# Altium PCB SB0037A.PcbDoc (part 2 of 7)
Units mil, origin at the board's own origin, x right, y up, seen from the top; angles counter-clockwise.
Board outline 2872.5 x 4560 mil, 6 copper layers (Top Layer, L2, L3, L4, L5, Bottom Layer), stack 30.268 mil thick; 282 components, 292 nets, 1320 pads, 687 vias.
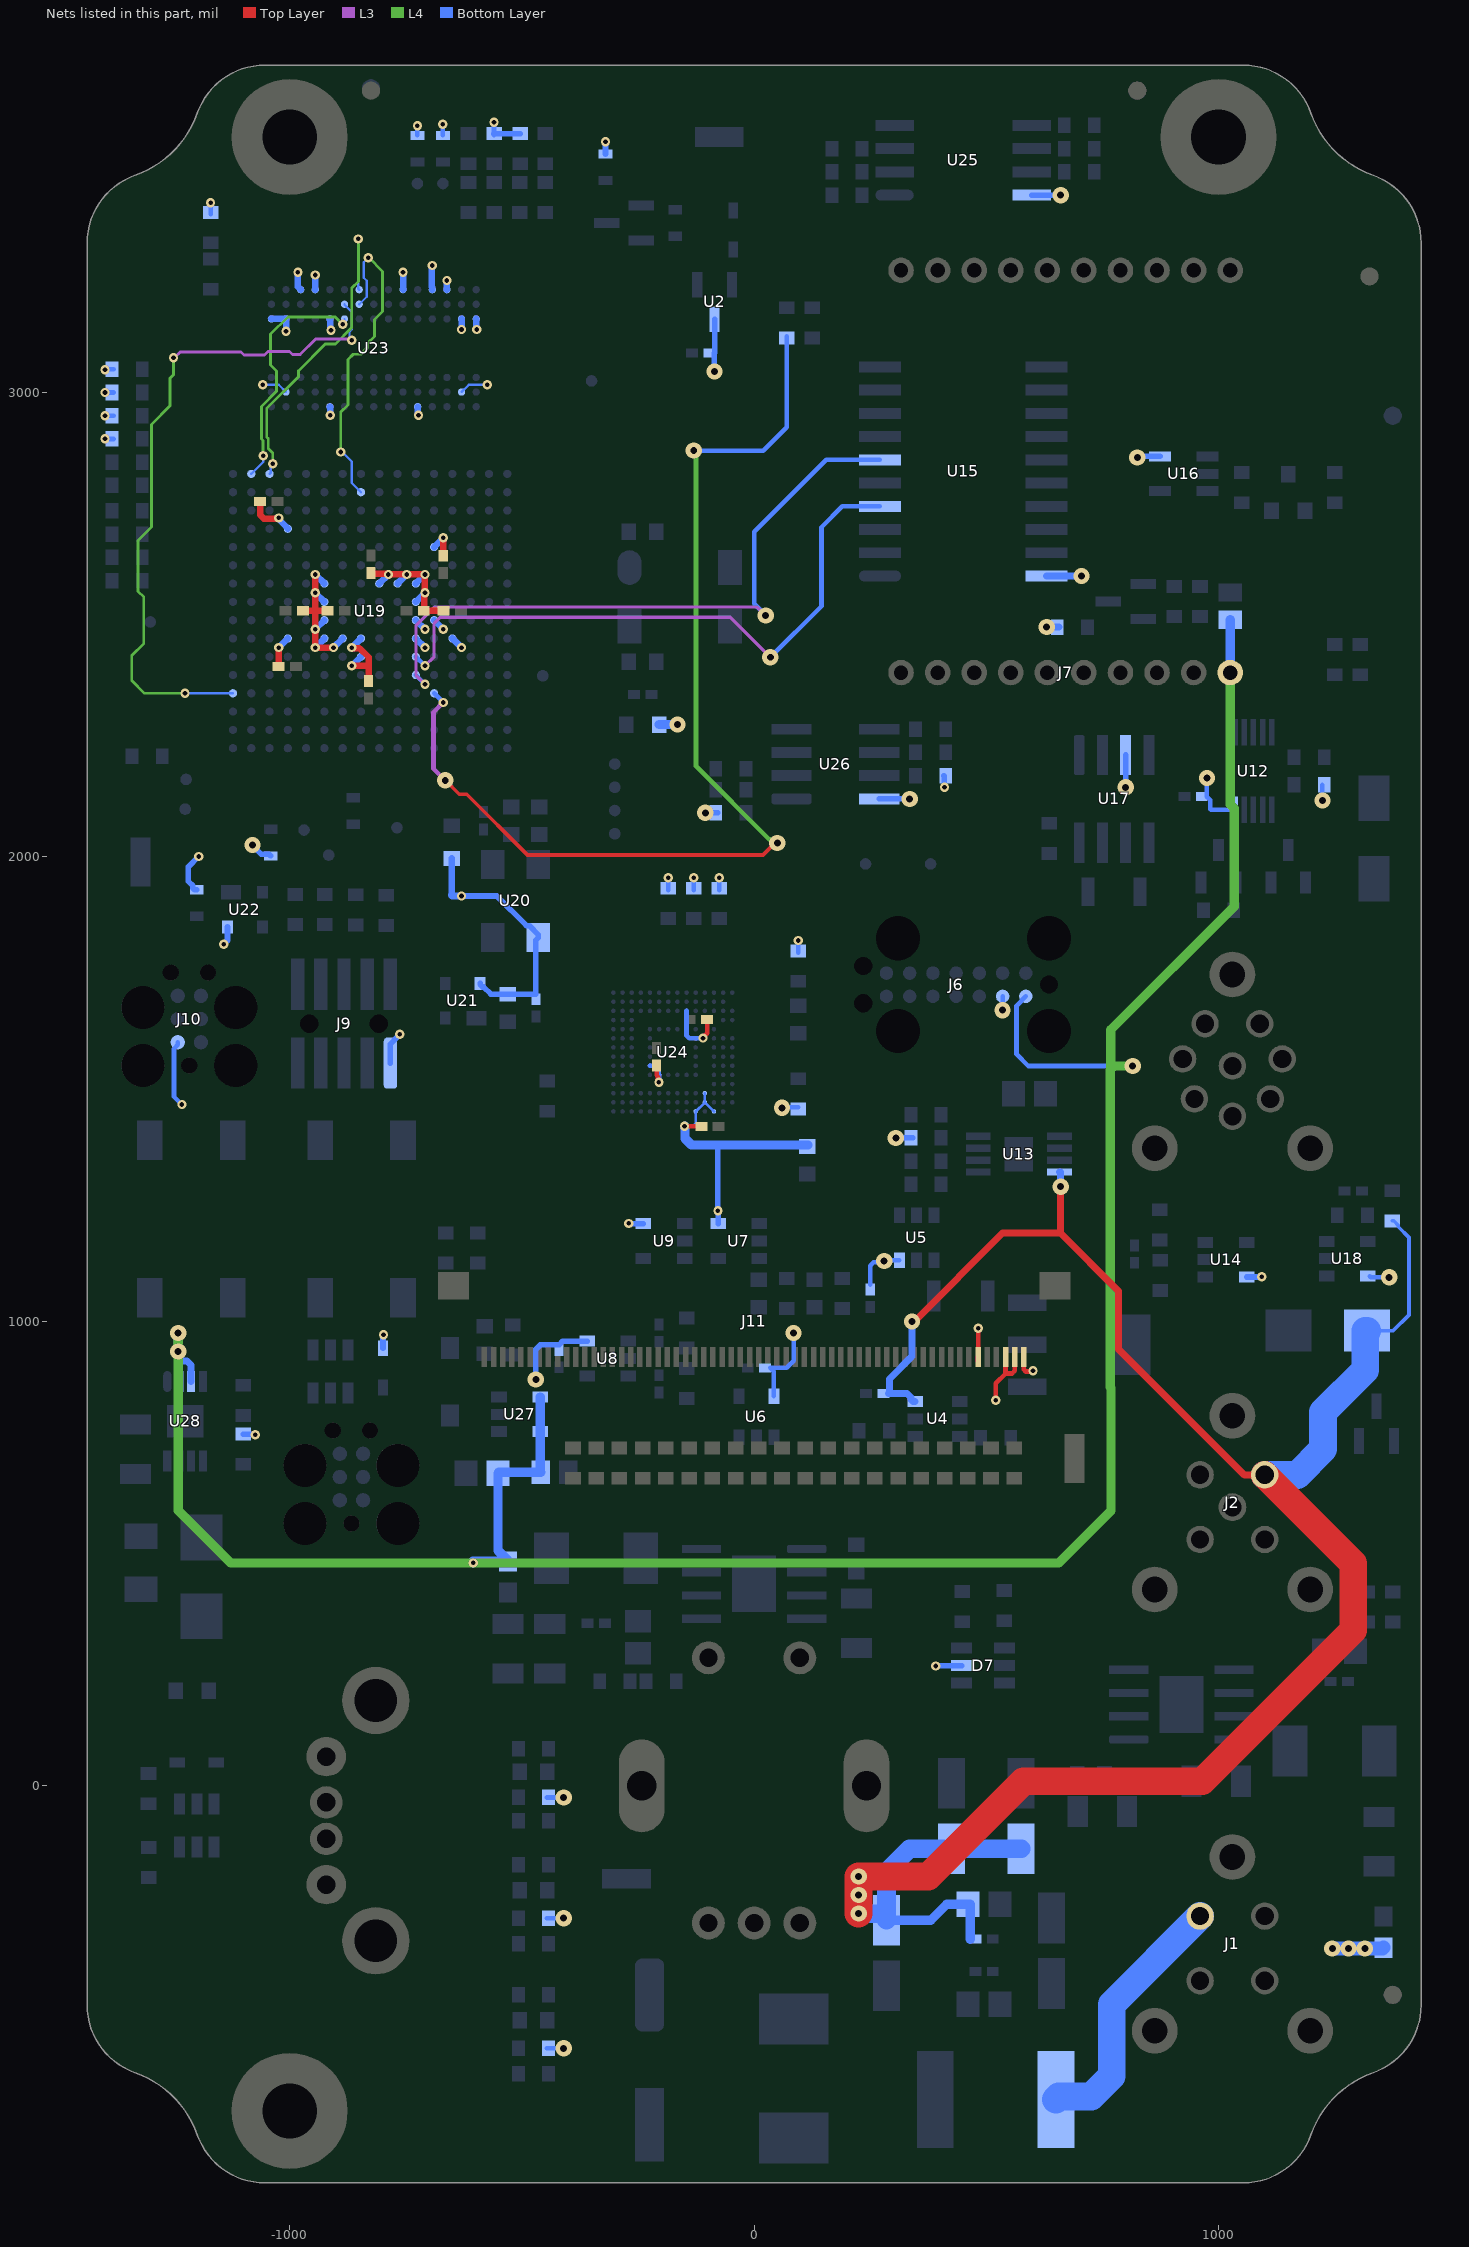
[diagram p6: the nets of this part, all layers, seen from the top]

## Part data
BTN1 BTN2: "SWITCH TACTILE SPST-NO 0.05A 12V", Contact Rating @ Voltage="0.05A @ 12VDC", Manufacturer="TE Connectivity", Operating Force=160gf, Supplier Part Number 1=450-1759-1-ND, Actuator Orientation="Top Actuated", Actuator Type=Standard, Category=Switches, Circuit=SPST-NO, ComponentLink1Description=http://documents.tycoelectronics.com/commerce/DocumentDelivery/DDEController?Action=srchrtrv&DocNm=2-1437565-7&DocType=CD&DocLang=EN, ComponentLink1URL=http://documents.tycoelectronics.com/commerce/DocumentDelivery/DDEController?Action=srchrtrv&DocNm=2-1437565-7&DocType=CD&DocLang=EN, Illumination=Non-Illuminated, Manufacturer Part Number=FSM4JSMATR, Mounting Type="Surface Mount", Outline="6.00mm x 6.00mm", Packaging="Cut Tape (CT)", Pricing 1="1=0.36, 10=0.34, 25=0.2912, 50=0.2474, 100=0.2377, 250=0.21344, 500=0.20374 (USD)", RoHS="RoHS Compliant", Stock 1=35617, Supplier 1=Digi-Key, Switch Function=Off-Mom, Termination Style="Gull Wing"
C1 C4 C6 C12 C13 C19 C20 C21 C24 C25 C26 C27 C29 C34 C38 C41 C42 C43 C44 C45 C46 C47 C48 C49 C50 C51 C53 C54 C55: library part CGA2B3X7R1E104K050BB, "CAP CER 0.1UF 25V X7R 0402", Manufacturer="TDK Corporation", Operating Temperature="-55°C ~ 125°C", Package=0402, Ratings=AEC-Q200, Supplier Part Number 1=445-6902-1-ND, Temperature Coefficient=X7R, Tolerance=±10%, Voltage - Rated=25V, Category=Capacitors, ComponentLink1Description="Datasheet (Internal)", ComponentLink1URL=datasheets\TDK\mlcc_automotive_general_en.pdf, ComponentLink2Description="Datasheet (External)", ComponentLink2URL=https://product.tdk.com/info/en/catalog/datasheets/mlcc_automotive_general_en.pdf, Features=-, Manufacturer Part Number=CGA2B3X7R1E104K050BB, Substitution Notes="0.1µF , 25V , ±10% , X7R , -55°C ~ 125°C , AEC-Q200 , 0402", Supplier 1=Digikey, Thickness (Max)=0.55MM
C2: library part EEE-FK1E221P, "CAP ALUM 220UF 25V 20% SMD", ESR (Equivalent Series Resistance)=-, Lifetime @ Temp#="2000 Hrs @ 105°C", Manufacturer="Panasonic Electronic Components", Operating Temperature="-55°C ~ 105°C", Package=F, Package / Case="Radial- Can - SMD", Ratings=AEC-Q200, Ripple Current=600mA, Sort Value=220000000, Sort Value Package=F_220000000, Supplier Part Number 1=PCE3800CT-ND, Temperature Coefficient="Temperature Coefficient", Tolerance=±20%, Value_Voltage="220µF  25V", Voltage Rating=25V, Capacitance=220µF, Category=Capacitors, ComponentLink1Description="Internal Datasheet", ComponentLink1URL=http://industrial.panasonic.com/www-cgi/jvcr13pz.cgi?E+PZ+3+ABA0120+EEEFK1E221P+7+WW, ComponentLink2Description="External Datasheet", ComponentLink2URL=http://industrial.panasonic.com/www-cgi/jvcr13pz.cgi?E+PZ+3+ABA0120+EEEFK1E221P+7+WW, Diameter=8.00, Features="General Purpose", Height=10.20, Height - Seated (Max)="0.402\" (10.20mm)", Impedance="160 mOhm", Lead Spacing=-, Manufacturer Part Number=EEE-FK1E221P, Mounting Type="Surface Mount", Packaging="Cut Tape (CT)", Size / Dimension="0.315\" Dia (8.00mm)", Supplier 1=Digi-Key, Surface Mount Land Size="0.327\" L x 0.327\" W (8.30mm x 8.30mm)"
C3 C5 C11 C18 C28: library part CGA4J3X7R1H105M125AE, "CAP CER 1UF 50V X7R 0805", Manufacturer="TDK Corporation", Operating Temperature="-55°C ~ 125°C", Package=0805, Ratings=AEC-Q200, Supplier Part Number 1=445-7958-1-ND, Temperature Coefficient=X7R, Tolerance=±20%, Voltage - Rated=50V, Category=Capacitors, ComponentLink1Description="Datasheet (Internal)", ComponentLink1URL=datasheets\TDK\mlcc_automotive_general_en.pdf, ComponentLink2Description="Datasheet (External)", ComponentLink2URL=https://product.tdk.com/info/en/catalog/datasheets/mlcc_automotive_general_en.pdf, Features="Soft Termination", Manufacturer Part Number=CGA4J3X7R1H105M125AE, Substitution Notes="1µF , 50V , ±20% , X7R , -55°C ~ 125°C , AEC-Q200 , 0805", Supplier 1=Digikey, Thickness (Max)=1.50MM
C7 C14: library part CGA5L1X7R1V106M160AE, "CAP CER 10UF 35V X7R 1206", Manufacturer="TDK Corporation", Package=1206, Ratings=AEC-Q200, Supplier Part Number 1=445-172484-1-ND, Temperature Coefficient=X7R, Tolerance=±20%, Voltage - Rated=35V, Category=Capacitors, ComponentLink1Description="Datasheet (Internal)", ComponentLink1URL=datasheets\TDK\mlcc_automotive_general_en.pdf, ComponentLink2Description="Datasheet (External)", ComponentLink2URL=https://product.tdk.com/info/en/catalog/datasheets/mlcc_automotive_general_en.pdf, Features="Soft Termination", Manufacturer Part Number=CGA5L1X7R1V106M160AE, Substitution Notes="10µF , 35V , ±20% , X7R ,  , AEC-Q200 , 1206", Supplier 1=Digikey, Thickness (Max)=1.90MM
C8 C15 C58: library part CGA3E3X7R1H224K080AB, "CAP CER 0.22UF 50V X7R 0603", Manufacturer="TDK Corporation", Operating Temperature="-55°C ~ 125°C", Package=0603, Ratings=AEC-Q200, Supplier Part Number 1=445-6926-1-ND, Temperature Coefficient=X7R, Tolerance=±10%, Voltage - Rated=50V, Category=Capacitors, ComponentLink1Description="Datasheet (Internal)", ComponentLink1URL=datasheets\TDK\mlcc_automotive_general_en.pdf, ComponentLink2Description="Datasheet (External)", ComponentLink2URL=https://product.tdk.com/info/en/catalog/datasheets/mlcc_automotive_general_en.pdf, Features=-, Manufacturer Part Number=CGA3E3X7R1H224K080AB, Substitution Notes="0.22µF , 50V , ±10% , X7R , -55°C ~ 125°C , AEC-Q200 , 0603", Supplier 1=Digikey, Thickness (Max)=0.90MM
C9 C10 C16 C17 C59: library part CGA5L1X7R0J226M160AC, "CAP CER 22UF 6.3V X7R 1206", Manufacturer="TDK Corporation", Operating Temperature="-55°C ~ 125°C", Package=1206, Ratings=AEC-Q200, Supplier Part Number 1=445-7884-1-ND, Temperature Coefficient=X7R, Tolerance=±20%, Voltage - Rated=6.3V, Category=Capacitors, ComponentLink1Description="Datasheet (Internal)", ComponentLink1URL=datasheets\TDK\mlcc_automotive_general_en.pdf, ComponentLink2Description="Datasheet (External)", ComponentLink2URL=https://product.tdk.com/info/en/catalog/datasheets/mlcc_automotive_general_en.pdf, Features=-, Manufacturer Part Number=CGA5L1X7R0J226M160AC, Substitution Notes="22µF , 6.3V , ±20% , X7R , -55°C ~ 125°C , AEC-Q200 , 1206", Supplier 1=Digikey, Thickness (Max)=1.60MM
C22 C23 C30 C31 C32 C39: library part CGA3E2C0G1H103J080AA, "CAP CER 10000PF 50V C0G 0603", Manufacturer="TDK Corporation", Operating Temperature="-55°C ~ 125°C", Package=0603, Ratings=AEC-Q200, Supplier Part Number 1=445-6916-1-ND, Temperature Coefficient="C0G, NP0", Tolerance=±5%, Voltage - Rated=50V, Category=Capacitors, ComponentLink1Description="Datasheet (Internal)", ComponentLink1URL=datasheets\TDK\mlcc_automotive_general_en.pdf, ComponentLink2Description="Datasheet (External)", ComponentLink2URL=https://product.tdk.com/info/en/catalog/datasheets/mlcc_automotive_general_en.pdf, Features=-, Manufacturer Part Number=CGA3E2C0G1H103J080AA, Substitution Notes="10000pF , 50V , ±5% , C0G, NP0 , -55°C ~ 125°C , AEC-Q200 , 0603", Supplier 1=Digikey, Thickness (Max)=0.90MM
C33 C57: library part CGA4J1X7R1V475K125AE, "CAP CER 4.7UF 35V X7R 0805", Manufacturer="TDK Corporation", Operating Temperature="-55°C ~ 125°C", Package=0805, Ratings=AEC-Q200, Supplier Part Number 1=445-172479-1-ND, Temperature Coefficient=X7R, Tolerance=±10%, Voltage - Rated=35V, Category=Capacitors, ComponentLink1Description="Datasheet (Internal)", ComponentLink1URL=datasheets\TDK\mlcc_automotive_general_en.pdf, ComponentLink2Description="Datasheet (External)", ComponentLink2URL=https://product.tdk.com/info/en/catalog/datasheets/mlcc_automotive_general_en.pdf, Features="Soft Termination", Manufacturer Part Number=CGA4J1X7R1V475K125AE, Substitution Notes="4.7µF , 35V , ±10% , X7R , -55°C ~ 125°C , AEC-Q200 , 0805", Supplier 1=Digikey, Thickness (Max)=1.50MM
C35 C36: library part CGA3E2C0G1H120J080AA, "CAP CER 12PF 50V C0G 0603", Manufacturer="TDK Corporation", Operating Temperature="-55°C ~ 125°C", Package=0603, Ratings=AEC-Q200, Supplier Part Number 1=445-5629-1-ND, Temperature Coefficient="C0G, NP0", Tolerance=±5%, Voltage - Rated=50V, Category=Capacitors, ComponentLink1Description="Datasheet (Internal)", ComponentLink1URL=datasheets\TDK\mlcc_automotive_general_en.pdf, ComponentLink2Description="Datasheet (External)", ComponentLink2URL=https://product.tdk.com/info/en/catalog/datasheets/mlcc_automotive_general_en.pdf, Features=-, Manufacturer Part Number=CGA3E2C0G1H120J080AA, Substitution Notes="12pF , 50V , ±5% , C0G, NP0 , -55°C ~ 125°C , AEC-Q200 , 0603", Supplier 1=Digikey, Thickness (Max)=0.90MM
C37 C40: library part CGA3E2C0G1H101J080AE, "CAP CER 100PF 50V NP0 0603", Manufacturer="TDK Corporation", Operating Temperature="-55°C ~ 125°C", Package=0603, Ratings=AEC-Q200, Supplier Part Number 1=445-173653-1-ND, Temperature Coefficient="C0G, NP0", Tolerance=±5%, Voltage - Rated=50V, Category=Capacitors, ComponentLink1Description="Datasheet (Internal)", ComponentLink1URL=datasheets\TDK\mlcc_automotive_general_en.pdf, ComponentLink2Description="Datasheet (External)", ComponentLink2URL=https://product.tdk.com/info/en/catalog/datasheets/mlcc_automotive_general_en.pdf, Features="Soft Termination", Manufacturer Part Number=CGA3E2C0G1H101J080AE, Substitution Notes="100pF , 50V , ±5% , C0G, NP0 , -55°C ~ 125°C , AEC-Q200 , 0603", Supplier 1=Digikey, Thickness (Max)=0.95MM
C52 C56: library part CGA3E1X7R0J225M080AC, "CAP CER 2.2UF 6.3V X7R 0603", Manufacturer="TDK Corporation", Operating Temperature="-55°C ~ 125°C", Package=0603, Ratings=AEC-Q200, Supplier Part Number 1=445-12572-1-ND, Temperature Coefficient=X7R, Tolerance=±20%, Voltage - Rated=6.3V, Category=Capacitors, ComponentLink1Description="Datasheet (Internal)", ComponentLink1URL=datasheets\TDK\mlcc_automotive_general_en.pdf, ComponentLink2Description="Datasheet (External)", ComponentLink2URL=https://product.tdk.com/info/en/catalog/datasheets/mlcc_automotive_general_en.pdf, Features=-, Manufacturer Part Number=CGA3E1X7R0J225M080AC, Substitution Notes="2.2µF , 6.3V , ±20% , X7R , -55°C ~ 125°C , AEC-Q200 , 0603", Supplier 1=Digikey, Thickness (Max)=0.90MM
D1: "DIODE TVS 15V 1500W UNI 5% SMC", Manufacturer="Littelfuse Inc", Package="DO-214AB- SMC", Power (Watts)=1500W, Supplier Device Package=SMC, Supplier Part Number 1=SMCJ15ALFCT-ND, Voltage - Breakdown=16.7V, Voltage - Reverse Standoff (Typ)=15V, Category="Circuit Protection", CategorySort=850, ComponentLink1Description="Internal Datasheet", ComponentLink1URL=http://www.littelfuse.com/data/en/Data_Sheets/Littelfuse_TVS_Diode_SMCJ.pdf, ComponentLink2Description="External Datasheet", ComponentLink2URL=http://www.littelfuse.com/data/en/Data_Sheets/Littelfuse_TVS_Diode_SMCJ.pdf, Diode Suffix=1A_2C, Manufacturer Part Number=SMCJ15A, Mounting Type="Surface Mount", Packaging="Cut Tape (CT)", Polarization=Unidirectional, SortValue=SMCJ15A, Supplier 1=Digi-Key
D2 D9 D11: "DIODE SCHOTTKY 40V 300MA SOD323", Average Rectified Current=300mA, Capacitance=10pF, Case/Package=SC, Forward Voltage=900mV, Manufacturer=STMicroelectronics, Max Forward Surge Current (Ifsm)=1A, Max Operating Temperature=150°C, Max Repetitive Reverse Voltage (Vrrm)=40V, Max Reverse Leakage Current=1uA, Min Operating Temperature=-40°C, Package Quantity=1, Peak Reverse Current=100uA, Supplier Part Number 1=497-7163-1-ND, Voltage Rating (DC)=30V, Category=Diodes, CategorySort=400, ComponentLink1Description=https://datasheet.ciiva.com/1177/1689724-1177952.pdf?src-supplier=Element14, ComponentLink1URL=https://datasheet.ciiva.com/1177/1689724-1177952.pdf?src-supplier=Element14, ComponentLink2Description=https://datasheet.ciiva.com/1200/1689724-1200625.pdf?src-supplier=Farnell, ComponentLink2URL=https://datasheet.ciiva.com/1200/1689724-1200625.pdf?src-supplier=Farnell, ComponentLink3Description=https://datasheet.ciiva.com/1200/cd00001322-1200626.pdf?src-supplier=Farnell, ComponentLink3URL=https://datasheet.ciiva.com/1200/cd00001322-1200626.pdf?src-supplier=Farnell, ComponentLink4Description=https://datasheet.ciiva.com/15192/getdatasheetpartid-185078-15192983.pdf?src-supplier=Verical, ComponentLink4URL=https://datasheet.ciiva.com/15192/getdatasheetpartid-185078-15192983.pdf?src-supplier=Verical, ComponentLink5Description=https://datasheet.ciiva.com/915/cd00001322-915529.pdf?src-supplier=Digi-Key, ComponentLink5URL=https://datasheet.ciiva.com/915/cd00001322-915529.pdf?src-supplier=Digi-Key, ComponentLink6Description=https://datasheet.ciiva.com/25954/cd00001322-25954459.pdf?src-supplier=Avnet+Europe, ComponentLink6URL=https://datasheet.ciiva.com/25954/cd00001322-25954459.pdf?src-supplier=Avnet+Europe, ComponentLink7Description=https://datasheet.ciiva.com/1177/1689724-1177950.pdf?src-supplier=Element14, ComponentLink7URL=https://datasheet.ciiva.com/1177/1689724-1177950.pdf?src-supplier=Element14, ComponentLink8Description=https://datasheet.ciiva.com/915/cd00001322-915527.pdf?src-supplier=Digi-Key, ComponentLink8URL=https://datasheet.ciiva.com/915/cd00001322-915527.pdf?src-supplier=Digi-Key, ComponentLink9Description=https://datasheet.ciiva.com/915/cd00001322-915528.pdf?src-supplier=Digi-Key, ComponentLink9URL=https://datasheet.ciiva.com/915/cd00001322-915528.pdf?src-supplier=Digi-Key, ComponentLink10Description=https://datasheet.ciiva.com/1177/1689724-1177951.pdf?src-supplier=Element14, ComponentLink10URL=https://datasheet.ciiva.com/1177/1689724-1177951.pdf?src-supplier=Element14, ComponentLink11Description=https://datasheet.ciiva.com/7622/1689724-7622351.pdf?src-supplier=Element14, ComponentLink11URL=https://datasheet.ciiva.com/7622/1689724-7622351.pdf?src-supplier=Element14, Contact Plating=Tin,Matte, Current Rating=300mA, Element Configuration=Single, Forward Current=300mA, Height=1.07mm, Lead Free="Lead Free", Length=1.8mm, Manufacturer Part Number=BAT54JFILM, Max Reverse Voltage (DC)=40V, Max Surge Current=1A, Mount="Surface Mount", Number of Pins=2, Output Current=300mA, Packaging 1="Tape and Reel", Peak Non-Repetitive Surge Current=1A, Polarity=Standard, Pricing 1="1=0.36000, 10=0.29200, 100=0.11960, 500=0.09978, 1000=0.06933 (USD)", Radiation Hardening=No, REACH SVHC="No SVHC", Recovery Time=5ns, Reverse Recovery Time=5ns, RoHS=Yes, Stock 1=46673, Supplier 1=Digi-Key, Termination=SMD/SMT, Weight=0.01lb, Width=1.45mm
D3: "DIODE SUPER FAST 2A 400V SMB", Capacitance @ Vr- F="25pF @ 4V- 1MHz", Current - Average Rectified (Io)=2A, Current - Reverse Leakage @ Vr="5µA @ 400V", Manufacturer="Diodes Inc", Package="DO-214AA- SMB", Supplier Device Package=SMB, Supplier Part Number 1=ES2G-FDICT-ND, Voltage - DC Reverse (Vr) (Max)=400V, Voltage - Forward (Vf) (Max) @ If="1.25V @ 2A", Category=Diodes, CategorySort=400, ComponentLink1Description="Internal Datasheet", ComponentLink1URL=http://www.diodes.com/datasheets/ds30212.pdf, ComponentLink2Description="External Datasheet", ComponentLink2URL=http://www.diodes.com/datasheets/ds30212.pdf, Diode Suffix=1A_2C, Diode Type=Standard, Manufacturer Part Number=ES2G-13-F, Mounting Type="Surface Mount", Num Pins=2, Packaging="Cut Tape (CT)", Reverse Recovery Time (trr)=35ns, SortValue=ES2G-13-F, Speed="Fast Recovery =< 500ns- > 200mA (Io)", Supplier 1=Digi-Key
D4: "DIODE SCHOTTKY 40V 2A SMA", Capacitance @ Vr- F="200pF @ 4V- 1MHz", Current - Average Rectified (Io)=2A, Current - Reverse Leakage @ Vr="500µA @ 40V", Manufacturer="Diodes Inc", Package="DO-214AC- SMA", Supplier Device Package=SMA, Supplier Part Number 1=B240A-FDICT-ND, Voltage - DC Reverse (Vr) (Max)=40V, Voltage - Forward (Vf) (Max) @ If="500mV @ 2A", Category=Diodes, CategorySort=400, ComponentLink1Description="Internal Datasheet", ComponentLink1URL=http://www.diodes.com/datasheets/ds13004.pdf, ComponentLink2Description="External Datasheet", ComponentLink2URL=http://www.diodes.com/datasheets/ds13004.pdf, Diode Suffix=1A_2C, Diode Type=Schottky, Manufacturer Part Number=B240A-13-F, Mounting Type="Surface Mount", Num Pins=2, Packaging="Cut Tape (CT)", Pricing="1 = 0.54  ;  10 = 0.38  ;  25 = 0.312  ;  100 = 0.2492  ;  250 = 0.18152  ;  500 = 0.1474  ;  1000 = 0.1133  ;  2500 = 0.10175 (USD)", Reverse Recovery Time (trr)=-, Sales Status=Active, SortValue=B240A-13-F, Speed="Fast Recovery =< 500ns- > 200mA (Io)", Stocked=-, Supplier 1=Digi-Key
D5: "DIODE ZENER 3.3V 300MW SOT23", Current - Reverse Leakage @ Vr="5µA @ 1V", Manufacturer="Diodes Inc", Operating Temperature="-65°C ~ 150°C", Package="TO-236-3- SC-59- SOT-23-3", Power - Max=300mW, Supplier Device Package=SOT-23-3, Supplier Part Number 1=BZX84B3V3-FDICT-ND, Tolerance=±2%, Voltage - Forward (Vf) (Max) @ If="900mV @ 10mA", Voltage - Zener (Nom) (Vz)=3.3V, Category=Diodes, CategorySort=400, ComponentLink1Description="Internal Datasheet", ComponentLink1URL=http://www.diodes.com/datasheets/BZX84Bxx(x).pdf, ComponentLink2Description="External Datasheet", ComponentLink2URL=http://www.diodes.com/datasheets/BZX84Bxx(x).pdf, Diode Suffix=1A_3C, Impedance (Max) (Zzt)="95 Ohm", Library Ref ARL=ARL_DZ_1A_3C, Manufacturer_P_N=BZX84B3V3-7-F, Manufacturer Part Number=BZX84B3V3-7-F, Mounting Type="Surface Mount", Num Pins=3, Packaging="Cut Tape (CT)", Pricing="1 = 0.19  ;  10 = 0.177  ;  25 = 0.1612  ;  100 = 0.1159  ;  250 = 0.06824  ;  500 = 0.05662  ;  1000 = 0.03863 (USD)", Sales Status=Active, SortValue=BZX84B3V3-7-F, Stocked=0, Supplier 1=Digi-Key
D6: "TVS DIODE 24VWM 70VC SOT23", Capacitance @ Frequency="11pF @ 1MHz", Current - Peak Pulse (10/1000µs)="3A (8/20µs)", Manufacturer="NXP Semiconductors", Operating Temperature="-65°C ~ 150°C", Package="TO-236-3, SC-59, SOT-23-3", Power - Peak Pulse=200W, Power Line Protection=No, Supplier Device Package=SOT-23-3, Supplier Part Number 1=568-4032-1-ND, Voltage - Breakdown (Min)=25.4V, Voltage - Clamping (Max) @ Ipp=70V, Voltage - Reverse Standoff (Typ)="24V (Max)", Applications=Automotive, Bidirectional Channels=2, Category=Diodes, CategorySort=400, ComponentLink1Description=http://www.nxp.com/documents/data_sheet/PESD1CAN.pdf, ComponentLink1URL=http://www.nxp.com/documents/data_sheet/PESD1CAN.pdf, Manufacturer 1="NXP Semiconductors", Manufacturer Part Number=PESD1CAN,215, Manufacturer Part Number 1=PESD1CAN,215, Mounting Type="Surface Mount", Packaging="Cut Tape (CT)", Pricing 1="1=0.55, 10=0.386, 25=0.3176, 100=0.2537, 250=0.1848, 500=0.15008, 1000=0.11536 (USD)", RoHS="RoHS Compliant", Stock 1=57937, Supplier 1=Digi-Key, Type=Zener, Unidirectional Channels=-
D7 D10 D13: "IC USB2.0 ESD PROTECTION SOT457", Manufacturer="NXP Semiconductors", Package="SC-74, SOT-457", Power (Watts)=100W, Supplier Device Package=6-TSOP, Supplier Part Number 1=568-5869-1-ND, Voltage - Breakdown=6V, Voltage - Reverse Standoff (Typ)=3V, Category=Diodes, CategorySort=400, ComponentLink1Description=http://www.nxp.com/documents/data_sheet/IP4234CZ6.pdf, ComponentLink1URL=http://www.nxp.com/documents/data_sheet/IP4234CZ6.pdf, Manufacturer 1="NXP Semiconductors", Manufacturer Part Number=IP4234CZ6,125, Manufacturer Part Number 1=IP4234CZ6,125, Mounting Type="Surface Mount", Packaging="Cut Tape (CT)", Polarization="2 Channel Array - Bidirectional", Pricing 1="1=0.52, 10=0.418, 25=0.3656, 100=0.3135, 250=0.27076, 500=0.23276, 1000=0.1805 (USD)", RoHS="RoHS Compliant", Stock 1=5142, Supplier 1=Digi-Key
D8: "DIODE SWITCH 100V 150MA SOD123", Capacitance @ Vr- F="2pF @ 0V- 1MHz", Current - Average Rectified (Io)=150mA, Current - Reverse Leakage @ Vr="1µA @ 75V", Manufacturer="Diodes Inc", Package=SOD-123, Supplier Part Number 1=1N4148W-FDICT-ND, Voltage - DC Reverse (Vr) (Max)=100V, Voltage - Forward (Vf) (Max) @ If="1.25V @ 150mA", Category=Diodes, CategorySort=400, ComponentLink1Description="Internal Datasheet", ComponentLink1URL=http://www.diodes.com/datasheets/ds30086.pdf, ComponentLink2Description="External Datasheet", ComponentLink2URL=http://www.diodes.com/datasheets/ds30086.pdf, Diode Suffix=1A_2C, Diode Type=Standard, Manufacturer Part Number=1N4148W-7-F, Mounting Type="Surface Mount", Num Pins=2, Packaging="Cut Tape (CT)", Reverse Recovery Time (trr)=4ns, SortValue=1N4148W-7-F, Speed="Small Signal =< 200mA (Io)- Any Speed", Supplier 1=Digi-Key, Supplier Device Package=SOD-123
D12: "TVS 5.0 VOLT 600 WATT UNI-DIR SM", Manufacturer="Littelfuse Inc", Package="DO-214AA- SMB", Power (Watts)=600W, Supplier Device Package=SMB, Supplier Part Number 1=SMBJ5.0ALFCT-ND, Voltage - Breakdown=6.4V, Voltage - Reverse Standoff (Typ)=5V, Category="Circuit Protection", CategorySort=850, ComponentLink1Description="Internal Datasheet", ComponentLink1URL=http://www.littelfuse.com/~/media/Files/Littelfuse/Technical%20Resources/Documents/Data%20Sheets/Littelfuse_TVS%20Diode_SMBJ.pdf, ComponentLink2Description="External Datasheet", ComponentLink2URL=http://www.littelfuse.com/~/media/Files/Littelfuse/Technical%20Resources/Documents/Data%20Sheets/Littelfuse_TVS%20Diode_SMBJ.pdf, Diode Suffix=1A_2C, Manufacturer Part Number=SMBJ5.0A, Mounting Type="Surface Mount", Packaging="Cut Tape (CT)", Polarization=Unidirectional, Pricing="1 = 0.46  ;  10 = 0.384  ;  25 = 0.336  ;  100 = 0.2877  ;  250 = 0.24952  ;  500 = 0.21134  ;  1000 = 0.16293 (USD)", Sales Status=Active, SortValue=SMBJ5.0A, Stocked=-, Supplier 1=Digi-Key
ENC1: "Encoders 15mm SHAFT w/SWITCH", Manufacturer=Bourns, Max Operating Temperature=70°C, Max Supply Voltage (DC)=5V, Min Operating Temperature=-30°C, Package Quantity=150, Supplier Part Number 1=PEC11R-4215K-S0024-ND, Built in Switch=Yes, Category=Encoders, ComponentLink1Description=https://datasheet.ciiva.com/29349/pec11r-29349515.pdf?src-supplier=Digi-Key, ComponentLink1URL=https://datasheet.ciiva.com/29349/pec11r-29349515.pdf?src-supplier=Digi-Key, ComponentLink2Description=https://datasheet.ciiva.com/30066/pec11r-221203-30066108.pdf?src-supplier=Onlinecomponents.com, ComponentLink2URL=https://datasheet.ciiva.com/30066/pec11r-221203-30066108.pdf?src-supplier=Onlinecomponents.com, ComponentLink3Description=https://datasheet.ciiva.com/12176/pec11r-221203-12176991.pdf?src-supplier=Mouser, ComponentLink3URL=https://datasheet.ciiva.com/12176/pec11r-221203-12176991.pdf?src-supplier=Mouser, Detent=Yes, Encoder Type=Mechanical, Height=13.4mm, Hole Diameter=1.8mm, Length=21.5mm, Manufacturer Part Number=PEC11R-4215K-S0024, Mount="Through Hole,Panel,PCB", Number of Channels=2, Orientation=Vertical, Output Type=Quadrature,Incremental, Packaging=Bulk, Pricing="1=1.68000, 10=1.56600, 25=1.47920, 50=1.30500, 100=1.07300, 250=1.04400, 500=0.98600, 1000=0.92800, 5000=0.81200 (USD)", Pulses per Revolution=24, REACH SVHC="No SVHC", RoHS=Yes, Stock=2990, Supplier 1=Digi-Key, Termination="PC Pin", Width=12.5mm
F1: library part 2920L300/15DR, "PTC RESETTABLE 15V 3A SMD 2920", Current - Hold (Ih) (Max)=3A, Current - Max=40A, Current - Trip (It)=5A, Current Trip=3, Manufacturer="Littelfuse Inc", Package="2920 (7351 Metric)- Concave", SortValue=15_3, Supplier Part Number 1=F2875CT-ND, Voltage - Max=15V, Category="Circuit Protection", CategorySort=850, ComponentLink1Description="Internal Datasheet", ComponentLink1URL=http://www.littelfuse.com/data/en/Data_Sheets/Littelfuse_PTC_2920L.pdf, ComponentLink2Description="External Datasheet", ComponentLink2URL=http://www.littelfuse.com/data/en/Data_Sheets/Littelfuse_PTC_2920L.pdf, Manufacturer Part Number=2920L300/15DR, Packaging="Cut Tape (CT)", R Min/Max="0.015 ~ 0.048 Ohm", Supplier 1=Digi-Key, Time to Trip=20s
F2: library part 1206L110THYR, "FUSE PTC RESET 8V 1.10A 1206", Current - Hold (Ih) (Max)=1.1A, Current - Max=100A, Current - Trip (It)=2.2A, Current Trip=1.1, Manufacturer="Littelfuse Inc", Package="1206 (3216 Metric)- Concave- Long Side Terminals", SortValue=8_1.1, Supplier Part Number 1=F3371CT-ND, Voltage - Max=8V, Category="Circuit Protection", CategorySort=850, ComponentLink1Description="Internal Datasheet", ComponentLink1URL=http://www.littelfuse.com/data/en/Data_Sheets/Littelfuse_PTC_1206L.pdf, ComponentLink2Description="External Datasheet", ComponentLink2URL=http://www.littelfuse.com/data/en/Data_Sheets/Littelfuse_PTC_1206L.pdf, Manufacturer Part Number=1206L110THYR, Packaging="Cut Tape (CT)", R Min/Max="0.040 ~ 0.180 Ohm", Supplier 1=Digi-Key, Time to Trip=0.1s
FID1 FID2 FID3 FID4 FID5 FID6 FID7 FID8: library part Fiducial
J1: "Circular Metric Connectors SACC-CI-M12MS- 4CON-L180 THR", Current Rating=4A, Manufacturer="Phoenix Contact", Max Operating Temperature=85°C, Min Operating Temperature=-25°C, Package Quantity=60, Ratings="IP67,Waterproof,Dust Tight", Supplier Part Number 1=277-13184-ND, Voltage Rating=250V, ComponentLink1Description=https://datasheet.ciiva.com/16136/1437164-16136065.pdf?src-supplier=Onlinecomponents.com, ComponentLink1URL=https://datasheet.ciiva.com/16136/1437164-16136065.pdf?src-supplier=Onlinecomponents.com, ComponentLink2Description=https://datasheet.ciiva.com/29256/586130-da-01-en-sens-akt-einbaust-4pol-1437164-60-st-29256645.pdf?src-supplier=Conrad, ComponentLink2URL=https://datasheet.ciiva.com/29256/586130-da-01-en-sens-akt-einbaust-4pol-1437164-60-st-29256645.pdf?src-supplier=Conrad, Connector Type=Plug, Contact Gender=Male, Contact Material=Brass, Contact Plating=Gold, Fastening Type=Threaded, Gender=Female, Housing Material=Polyamide, Manufacturer Part Number=1437164, Max Current Rating=4A, Mount="Through Hole", Number of Contacts=4, Number of Ports=1, Number of Positions=4, Number of Terminals=4, Orientation=Straight, Packaging=Tray, Pricing 1="1=6.15000, 10=5.88500, 50=5.72500, 100=5.35040, 250=4.92240, 500=4.54784, 1000=4.33387, 2500=3.87875 (USD)", RoHS=Yes, Stock 1=71, Strain Relief="No (Without)", Supplier 1=Digi-Key, Termination=Solder, Thread Size=M12
J2: "Flush-type connector SACC-CI-M12FS-5CON-L180-THR 1551448 Phoenix Contact", Current Rating=4A, Manufacturer="Phoenix Contact", Max Operating Temperature=85°C, Min Operating Temperature=-25°C, Package Quantity=60, Ratings="IP67,Waterproof,Dust Tight", Supplier Part Number 1=277-13414-ND, Voltage Rating=60V, ComponentLink1Description=https://datasheet.ciiva.com/618/1551448-618993.pdf?src-supplier=Digi-Key, ComponentLink1URL=https://datasheet.ciiva.com/618/1551448-618993.pdf?src-supplier=Digi-Key, ComponentLink2Description=https://datasheet.ciiva.com/24433/1551448-24433704.pdf?src-supplier=Onlinecomponents.com, ComponentLink2URL=https://datasheet.ciiva.com/24433/1551448-24433704.pdf?src-supplier=Onlinecomponents.com, ComponentLink3Description=https://datasheet.ciiva.com/29259/719975-da-01-en-sens-akt-einbaubuch-5pol-1551448-60-st-29259372.pdf?src-supplier=Conrad, ComponentLink3URL=https://datasheet.ciiva.com/29259/719975-da-01-en-sens-akt-einbaubuch-5pol-1551448-60-st-29259372.pdf?src-supplier=Conrad, Connector Type=Receptacle, Contact Gender=Female, Contact Material=Brass, Contact Plating=Gold, Fastening Type=Threaded, Lead Free="Lead Free", Manufacturer Part Number=1551448, Max Current Rating=4A, Mount="Through Hole", Number of Contacts=5, Number of Ports=1, Number of Positions=5, Number of Terminals=5, Orientation=Straight, Packaging=Tray, Plating=Polyamide, Pricing="1=8.12, 10=7.771, 50=7.5588, 100=7.0642, 250=6.4991, 500=6.0046, 1000=5.722, 2500=5.3688 (USD)", RoHS=Yes, Stock=70, Supplier 1=Digi-Key, Termination=Solder, Thread Size=M12, Weight=0.123459oz
J3 J4: "0603 Solid High Current Jumper", Manufacturer="Keystone Electronics", Operating Temperature=-, Package / Case="0603 (1608 Metric)", Power (Watts)="0.5W, 1/2W", Resistance (Ohms)=0.0, Supplier Device Package=0603, Supplier Part Number 1=36-5110CT-ND, Tolerance=Jumper, Category=5110, ComponentLink1Description=http://www.keyelco.com/product-pdf.cfm?p=14038, ComponentLink1URL=http://www.keyelco.com/product-pdf.cfm?p=14038, Composition="Thick Film", Features=-, Height="0.028\" (0.70mm)", Manufacturer Part Number=5110, Number of Terminations=2, Packaging="Cut Tape (CT)", Pricing 1="1=0.41, 10=0.384, 50=0.28, 100=0.2691, 250=0.24164, 500=0.23066 (USD)", RoHS="RoHS Compliant", Size / Dimension="0.061\" L x 0.033\" W (1.55mm x 0.85mm)", Stock 1=23484, Supplier 1=Digi-Key, Temperature Coefficient=-
J5: "Circular Metric Connectors SACC-DSI-FSD -4CON-PG9/0,5 SCO", Current Rating=2A, Manufacturer="Phoenix Contact", Max Operating Temperature=85°C, Min Operating Temperature=-25°C, Package Quantity=1, Ratings="IP67,Waterproof,Dust Tight", Supplier Part Number 1=277-8390-ND, Voltage Rating=30V, Category="Circular Connectors", ComponentLink1Description=https://datasheet.ciiva.com/15179/getdatasheetpartid-320397-15179574.pdf?src-supplier=Verical, ComponentLink1URL=https://datasheet.ciiva.com/15179/getdatasheetpartid-320397-15179574.pdf?src-supplier=Verical, Connector Type=Plug, Contact Gender=Female, Contact Material=Brass, Contact Plating=Gold, Fastening Type=Threaded, Lead Free="Lead Free", Manufacturer Part Number=1552269, Max Current Rating=2A, Mount="Through Hole", Number of Contacts=8, Number of Positions=8, Orientation=Straight, Packaging=Tray, Pricing="1=11.18000, 10=10.69000, 50=10.39880, 100=9.71850, 250=8.94108, 500=8.26078, 1000=7.87201 (USD)", Radiation Hardening=No, RoHS=Yes, Stock=60, Strain Relief="No (Without)", Supplier 1=Digi-Key, Termination=Solder, Thread Size=M12, Weight=0.128397oz
J6: library part TC2070
J7 J8: "CONN RECEPT 2MM SINGLE STR 10POS", Colour=Black, Current Rating=1A, Insulation Resistance=5GR, Manufacturer=Sullins, Max Operating Temperature=105°C, Min Operating Temperature=-40°C, Package Quantity=1000, Supplier Part Number 1=S5751-10-ND, ComponentLink1Description=https://drawings-pdf.s3.amazonaws.com/10483.pdf, ComponentLink1URL=https://drawings-pdf.s3.amazonaws.com/10483.pdf, Connector Type=Header,Socket, Contact Material=Bronze, Contact Plating=Gold, Gender=Female, Lead Free="Lead Free", Manufacturer Part Number=NPPN101BFCN-RC, Material=Nylon, Mount="Through Hole", Number of Positions=10, Number of Rows=1, Packaging=Bulk, Pitch=0.079inch, Pricing="1 = 0.98000, 60 = 0.78033, 120 = 0.74650, 540 = 0.61074, 1020 = 0.54288, 5040 = 0.49010 (USD)", RoHS=Yes, Stock=72438, Supplier 1=Digi-Key, Termination=Solder
J9: "CONN HEADER 10POS DUAL .05\" SMD", Color=Black, Manufacturer="Samtec Inc", Supplier Part Number 1=FTSH-105-01-F-DV-K-A-ND, Category=Connectors, CategorySort=800, ComponentLink1Description=http://www.samtec.com/documents/webfiles/cpdf/FTSH-1XX-XX-XXX-DV-XXX-MKT.pdf, ComponentLink1URL=http://www.samtec.com/documents/webfiles/cpdf/FTSH-1XX-XX-XXX-DV-XXX-MKT.pdf, Connector Type="Header, Unshrouded", Contact Finish=Gold, Contact Finish Thickness="3µin (0.08µm)", Contact Mating Length="0.120\" (3.05mm)", Contact Type="Male Pin", Fastening Type=-, Features=-, Manufacturer Part Number=FTSH-105-01-F-DV-K-A, Mounting Type="Surface Mount", Number of Positions=10, Number of Positions Loaded=All, Number of Rows=2, Packaging=Tube, Pitch="0.050\" (1.27mm)", Pricing 1="1=3.59 (USD)", RoHS="RoHS Compliant", Row Spacing="0.050\" (1.27mm)", Stock 1=0, Supplier 1=Digi-Key, Termination=Solder
J10: "Tag Connect Pads - No latching Clips - ARM"
J11: "CONN FPC 60POS 0.50MM R/A", Contact Resistance=50mR, Current Rating=500mA, Flammability Rating="UL94 V-0", Housing Color=Natural, Manufacturer=Omron, Max Operating Temperature=85°C, Max Voltage Rating (AC)=50V, Min Operating Temperature=-30°C, Package Quantity=1, Supplier Part Number 1=88M4894, Actuator Material="Polymer,Liquid Crystal Polymer", ComponentLink1Description=https://datasheet.ciiva.com/26945/getdatasheetpartid-792262-26945584.pdf?src-supplier=Verical, ComponentLink1URL=https://datasheet.ciiva.com/26945/getdatasheetpartid-792262-26945584.pdf?src-supplier=Verical, ComponentLink2Description=https://datasheet.ciiva.com/672/en-xf2m-672256.pdf?src-supplier=Digi-Key, ComponentLink2URL=https://datasheet.ciiva.com/672/en-xf2m-672256.pdf?src-supplier=Digi-Key, ComponentLink3Description=https://datasheet.ciiva.com/10367/xf2m-10367321.pdf?src-supplier=Avnet, ComponentLink3URL=https://datasheet.ciiva.com/10367/xf2m-10367321.pdf?src-supplier=Avnet, ComponentLink4Description=https://datasheet.ciiva.com/16122/en-xf2m-16122554.pdf?src-supplier=Onlinecomponents.com, ComponentLink4URL=https://datasheet.ciiva.com/16122/en-xf2m-16122554.pdf?src-supplier=Onlinecomponents.com, ComponentLink5Description=https://datasheet.ciiva.com/672/en-xf2m-672255.pdf?src-supplier=Digi-Key, ComponentLink5URL=https://datasheet.ciiva.com/672/en-xf2m-672255.pdf?src-supplier=Digi-Key, ComponentLink6Description=https://datasheet.ciiva.com/7989/1465437-7989453.pdf?src-supplier=Element14, ComponentLink6URL=https://datasheet.ciiva.com/7989/1465437-7989453.pdf?src-supplier=Element14, ComponentLink7Description=https://datasheet.ciiva.com/672/en-xf2m-672254.pdf?src-supplier=Digi-Key, ComponentLink7URL=https://datasheet.ciiva.com/672/en-xf2m-672254.pdf?src-supplier=Digi-Key, Contact Material="Copper Alloy", Contact Plating=Gold, Depth=6.2mm, Gender=Receptacle, Housing Material=Polymer, Lead Free="Lead Free", Length=34.1mm, Manufacturer Part Number=XF2M-6015-1AH, Max Current Rating=500mA, Max Voltage Rating (DC)=50V, Mount="Surface Mount", Number of Contacts=60, Number of Positions=60, Number of Rows=1, Orientation="Right Angle", Packaging="Tape and Reel", Pitch=0.5mm, Pricing 1="1=0.63900, 10=0.63900, 25=0.63900, 50=0.63900, 100=0.63900, 250=0.63900, 500=0.63900 (USD)", REACH SVHC=Unknown, RoHS=Yes, Stock 1=1054, Supplier 1=Newark, Termination=Solder, Voltage Rating=50V
J12: "Tag Connect Pads - No latching Clips - USB"
J13: "CONN RCPT USB2.0 TYPEA 4POS PCB", Flammability Rating="UL94 V-0", Manufacturer="Amphenol Industrial", Ratings=IP67, Supplier Part Number 1=MUSBRA511R0-ND, Category=Connectors, CategorySort=800, ComponentLink1Description=https://cdn.amphenol-icc.com/media/wysiwyg/files/documentation/datasheet/inputoutput/io_harsh_musb-type-a-b-ab.pdf?src-supplier=Digi-Key, ComponentLink1URL=https://cdn.amphenol-icc.com/media/wysiwyg/files/documentation/datasheet/inputoutput/io_harsh_musb-type-a-b-ab.pdf?src-supplier=Digi-Key, Connector Type=USB, Features=Shielded, Gender=Receptacle, Manufacturer Part Number=MUSBRA511R0, Mount="Through Hole,Panel", Number of Contacts=4, Orientation=Straight, Packaging 1=Bulk, Pricing 1="1=9.44000, 10=9.02900, 25=8.20800, 50=7.79760, 100=7.59240, 250=6.77160, 500=6.36120, 1000=5.92800 (USD)", RoHS=Yes, Stock 1=619, Supplier 1=Digi-Key
L1 L2 L4 L5: library part 35F0121-0SR-10, "Power Supply FB 10A", Case/Package=SMD/SMT, Case Code (Imperial)=1612, Case Code (Metric)=4131, DC Resistance (DCR)=0.75mR, Frequency=10MHz, Manufacturer="Laird Steward", Manufacturer Name=Laird, Max Current Rating=10A, Max Operating Temperature=125°C, Min Operating Temperature=-40°C, Package Quantity=2500, Resistance=42R, Supplier Part Number 1=240-2520-1-ND, Test Frequency=100MHz, Tolerance=25%, ComponentLink1Description=http://lairdtech.thomasnet.com/Asset/35F0121-0SR-10-C-2-VP.pdf, ComponentLink1URL=http://lairdtech.thomasnet.com/Asset/35F0121-0SR-10-C-2-VP.pdf, ComponentLink2Description=http://datasheet.octopart.com/35F0121-0SR-10-Steward-datasheet-65778.pdf, ComponentLink2URL=http://datasheet.octopart.com/35F0121-0SR-10-Steward-datasheet-65778.pdf, ComponentLink3Description=http://datasheet.octopart.com/35F0121-0SR-10-Steward-datasheet-153820.pdf, ComponentLink3URL=http://datasheet.octopart.com/35F0121-0SR-10-Steward-datasheet-153820.pdf, ComponentLink4Description=http://datasheet.octopart.com/35F0121-0SR-10-Steward-datasheet-14434158.pdf, ComponentLink4URL=http://datasheet.octopart.com/35F0121-0SR-10-Steward-datasheet-14434158.pdf, Core Material=Ferrite, Depth=3.05mm, Height=0.12inch, Impedance=41R, Lead Free="Lead Free", Length=0.16inch, Manufacturer Part No.=35F0121-0SR-10, Manufacturer Part Number=35F0121-0SR-10, Max DC Current=10A, Mount="Surface Mount", Number of Lines=1, Packaging="Tape and Reel", Pricing="1 = 0.29000, 10 = 0.22600, 25 = 0.18760, 50 = 0.16160, 100 = 0.14540, 250 = 0.12280, 500 = 0.10988, 1000 = 0.09371 (USD)", Rating=10A, Stock=289479, Supplier 1=Digi-Key, Termination=SMD/SMT, Weight=0.00512oz, Width=0.12inch
L3 L6: library part IHLP2020CZER2R2M11, "FIXED IND 2.2UH 6.75A 25 MOHM", Case/Package=2020, Current Rating=6.75A, DC Resistance (DCR)=25mR, Inductance Tolerance=20%, Manufacturer="Vishay Dale", Max DC Current=5.5A, Max Operating Temperature=125°C, Min Operating Temperature=-55°C, Package Quantity=2000, Self Resonant Frequency=41MHz, Supplier Part Number 1=541-1236-1-ND, Test Frequency=100kHz, Category=INDUCTOR, CategorySort=300, ComponentLink1Description=https://datasheet.ciiva.com/11798/0900766b8102c930-11798352.pdf?src-supplier=RSComponents, ComponentLink1URL=https://datasheet.ciiva.com/11798/0900766b8102c930-11798352.pdf?src-supplier=RSComponents, ComponentLink2Description=https://datasheet.ciiva.com/1051/lp20cz11-1051642.pdf?src-supplier=Digi-Key, ComponentLink2URL=https://datasheet.ciiva.com/1051/lp20cz11-1051642.pdf?src-supplier=Digi-Key, ComponentLink3Description=https://datasheet.ciiva.com/1051/lp20cz11-1051643.pdf?src-supplier=Digi-Key, ComponentLink3URL=https://datasheet.ciiva.com/1051/lp20cz11-1051643.pdf?src-supplier=Digi-Key, ComponentLink4Description=https://datasheet.ciiva.com/17269/lp20cz11-17269547.pdf?src-supplier=Avnet+Europe, ComponentLink4URL=https://datasheet.ciiva.com/17269/lp20cz11-17269547.pdf?src-supplier=Avnet+Europe, ComponentLink5Description=https://datasheet.ciiva.com/1051/lp20cz11-1051644.pdf?src-supplier=Digi-Key, ComponentLink5URL=https://datasheet.ciiva.com/1051/lp20cz11-1051644.pdf?src-supplier=Digi-Key, ComponentLink6Description=https://datasheet.ciiva.com/24205/lp20cz11-24205966.pdf?src-supplier=Future+Electronics, ComponentLink6URL=https://datasheet.ciiva.com/24205/lp20cz11-24205966.pdf?src-supplier=Future+Electronics, ComponentLink7Description=https://datasheet.ciiva.com/46385/480942-46385615.pdf?src-supplier=Element14, ComponentLink7URL=https://datasheet.ciiva.com/46385/480942-46385615.pdf?src-supplier=Element14, Contact Plating=Tin, Core Material=Metal,Composite, Depth=5.43mm, Height=3mm, Height - Seated (Max)=0.118inch, Inductance=2.2uH, Lead Free="Lead Free", Length=5.74mm, Manufacturer Part Number=IHLP2020CZER2R2M11, Military Standard=Not, Mount="Surface Mount", Packaging 1="Tape and Reel", Pricing 1="1=2.39000, 10=2.20800, 100=1.54560, 500=1.25120, 1000=1.14080 (USD)", Radiation Hardening=No, REACH SVHC=Unknown, RMS Current (Irms)=6.75A, RoHS=Yes, Saturation Current=5.5A, Shielding=Shielded, Stock 1=63099, Supplier 1=Digi-Key, Termination=SMD/SMT, Tolerance=20%, Width=0.204inch
L7 L8 L10: "FERRITE CHIP 600 OHM 500MA 0603", Current Rating=500mA, DC Resistance (DCR)="380 mOhm Max", Impedance @ Frequency="600 Ohm @ 100MHz", Manufacturer="Murata Electronics North America", Package="0603 (1608 Metric)", Supplier Part Number 1=490-1014-1-ND, Category=Inductors, CategorySort=300, ComponentLink1Description=http://search.murata.co.jp/Ceramy/image/img/PDF/ENG/L0110S0100BLM18A.pdf, ComponentLink1URL=http://search.murata.co.jp/Ceramy/image/img/PDF/ENG/L0110S0100BLM18A.pdf, Filter Type="Differential Mode - Single", Height (Max)="0.037\" (0.95mm)", Manufacturer Part Number=BLM18AG601SN1D, Mounting Type="Surface Mount", Packaging="Cut Tape (CT)", Pricing 1="1=0.1, 10=0.079, 50=0.0648, 100=0.0476, 250=0.0346, 500=0.0317, 1000=0.02738 (USD)", RoHS="RoHS Compliant", Size / Dimension="0.063\" L x 0.031\" W (1.60mm x 0.80mm)", Stock 1=139441, Supplier 1=Digi-Key
L9: library part LBR2012T470KV, "Inductor 47µH 0.075A", Inductance (uH)=47, Manufacturer="Taiyo Yuden", Package=0805, Rating=AEC-Q200, Sort Value=47_0.075, Sort Value Package=47_0.075_0805, Supplier Part Number 1=587-4044-1-ND, Tolerance=±10%, Category=Inductors, CategorySort=300, ComponentLink1Description="External Datasheet", ComponentLink1URL="https://ds.yuden.co.jp/TYCOMPAS/ut/detail?pn=LBR2012T470KV  &u=M", DCR Max (Ohms)=1.7Ohm, Height (mm)=1.45MM, IRMS=0.075, Isat (A)=0.075, Manufacturer Part Number=LBR2012T470KV, Part Number=LBR2012T470KV, Shielding=Unshielded, SRF typ (MHz)=11MHz, Supplier 1=Digikey, Supplier Unit Price 1=0.25
Q1: "Trans MOSFET N-CH 40V 7A 4-Pin(3+Tab) SOT-223 T/R", Case/Package=SOT-223, Continuous Drain Current (ID)=7A, Current Rating=6.7A, Drain to Source Breakdown Voltage=40V, Drain to Source Resistance=75mR, Gate to Source Voltage (Vgs)=20V, Input Capacitance=770pF, Manufacturer="Diodes Zetex", Max Operating Temperature=150°C, Max Power Dissipation=3.9W, Min Operating Temperature=-55°C, Package Quantity=1000, Supplier Part Number 1=ZXMN4A06GCT-ND, Threshold Voltage=1V, ComponentLink1Description=https://datasheet.ciiva.com/16509/zxmn4a06g-16509072.pdf?src-supplier=Future+Electronics, ComponentLink1URL=https://datasheet.ciiva.com/16509/zxmn4a06g-16509072.pdf?src-supplier=Future+Electronics, ComponentLink2Description=https://datasheet.ciiva.com/11176/zxmn4a06g-11176340.pdf?src-supplier=Avnet, ComponentLink2URL=https://datasheet.ciiva.com/11176/zxmn4a06g-11176340.pdf?src-supplier=Avnet, ComponentLink3Description=https://datasheet.ciiva.com/26816/getdatasheetpartid-86229-26816612.pdf?src-supplier=Verical, ComponentLink3URL=https://datasheet.ciiva.com/26816/getdatasheetpartid-86229-26816612.pdf?src-supplier=Verical, ComponentLink4Description=https://datasheet.ciiva.com/5775/44098-5775224.pdf?src-supplier=Farnell, ComponentLink4URL=https://datasheet.ciiva.com/5775/44098-5775224.pdf?src-supplier=Farnell, ComponentLink5Description=https://datasheet.ciiva.com/11174/zxmn4a06g-11174983.pdf?src-supplier=Avnet, ComponentLink5URL=https://datasheet.ciiva.com/11174/zxmn4a06g-11174983.pdf?src-supplier=Avnet, Drain to Source Voltage (Vdss)=40V, Element Configuration=Single, Fall Time=7.35ns, Height=1.65mm, Lead Free="Lead Free", Length=6.7mm, Manufacturer Part Number=ZXMN4A06GTA, Mount="Surface Mount", Number of Channels=1, Number of Elements=1, Number of Pins=4, On-State Resistance=75mR, Packaging="Tape and Reel", Power Dissipation=3.9W, Pricing 1="1=0.84000, 10=0.73900, 100=0.50380, 500=0.42096 (USD)", Radiation Hardening=No, Rds On Max=50mR, REACH SVHC="No SVHC", Rise Time=4.45ns, RoHS=Yes, Stock 1=50125, Supplier 1=Digi-Key, Turn-Off Delay Time=28.61ns, Turn-On Delay Time=2.55ns, Voltage Rating (DC)=40V, Weight=0.000282oz, Width=3.7mm
Q2 Q3: "FAIRCHILD SEMICONDUCTOR - BSS138 - N CHANNEL MOSFET, 50V, 220mA SOT-23", Manufacturer="FAIRCHILD SEMICONDUCTOR", Package=SOT-23, Supplier Part Number 1=58K8769, Category=Semiconductors, CategorySort=500, ComponentLink1Description=http://www.fairchildsemi.com/ds/BS/BSS138.pdf, ComponentLink1URL=http://www.fairchildsemi.com/ds/BS/BSS138.pdf, Manufacturer Part Number=BSS138, Pricing 1="1=0.077, 25=0.064, 100=0.049, 250=0.039, 500=0.035, 1000=0.03 (USD)", RoHS=YES, Stock 1=17000, Supplier 1=Newark
R1 R3 R31 R37 R38 R55 R56 R57 R58: library part ERJ-3EKF1003V, "RES 100K OHM 1/10W 1% 0603 SMD", Limiting Element Voltage=75, Manufacturer="Panasonic Electronic Components", Maximum Overload Voltage=150, Maximum Working Voltage=75.0V, Package="0603 (1608 Metric)", Package Power="0603  (0.1W)", Power (Watts)="0.1W- 1/10W", Ratings=AEC-Q200, Sort Value=100000, Sort Value Package=603_100000, Supplier Package=0603, Supplier Part Number 1=P100KHCT-ND, Temperature Coefficient=±100ppm/°C, Tolerance=±1%, Category=Resistors, ComponentLink1Description="Internal Datasheet", ComponentLink1URL="datasheets\Panasonic Electronic Components\AOA0000CE2.pdf", ComponentLink2Description="External Datasheet", ComponentLink2URL=http://industrial.panasonic.com/www-data/pdf/AOA0000/AOA0000CE2.pdf, Composition="Thick Film", Features=-, Height=0.55MM, Manufacturer Part Number=ERJ-3EKF1003V, Number of Terminations=2, Packaging="Cut Tape (CT)", Resistance (Ohms)=100k, Size / Dimension="0.063\" L x 0.031\" W (1.60mm x 0.80mm)", Substitution Notes="100k , ±1% , 0603 , AEC-Q200", Supplier 1=Digi-Key
R2: library part ERJ-3EKF4322V, "RES 43.2K OHM 1/10W 1% 0603 SMD", Limiting Element Voltage=75, Manufacturer="Panasonic Electronic Components", Maximum Overload Voltage=150, Maximum Working Voltage=65.7V, Package="0603 (1608 Metric)", Package Power="0603  (0.1W)", Power (Watts)="0.1W- 1/10W", Ratings=AEC-Q200, Sort Value=43200, Sort Value Package=603_43200, Supplier Package=0603, Supplier Part Number 1=P43.2KHCT-ND, Temperature Coefficient=±100ppm/°C, Tolerance=±1%, Category=Resistors, ComponentLink1Description="Internal Datasheet", ComponentLink1URL="datasheets\Panasonic Electronic Components\AOA0000CE2.pdf", ComponentLink2Description="External Datasheet", ComponentLink2URL=http://industrial.panasonic.com/www-data/pdf/AOA0000/AOA0000CE2.pdf, Composition="Thick Film", Features=-, Height=0.55MM, Manufacturer Part Number=ERJ-3EKF4322V, Number of Terminations=2, Packaging="Cut Tape (CT)", Resistance (Ohms)=43.2k, Size / Dimension="0.063\" L x 0.031\" W (1.60mm x 0.80mm)", Substitution Notes="43.2k , ±1% , 0603 , AEC-Q200", Supplier 1=Digi-Key
R4: library part ERJ-3EKF2492V, "RES 24.9K OHM 1/10W 1% 0603 SMD", Limiting Element Voltage=75, Manufacturer="Panasonic Electronic Components", Maximum Overload Voltage=150, Maximum Working Voltage=49.9V, Package="0603 (1608 Metric)", Package Power="0603  (0.1W)", Power (Watts)="0.1W- 1/10W", Ratings=AEC-Q200, Sort Value=24900, Sort Value Package=603_24900, Supplier Package=0603, Supplier Part Number 1=P24.9KHCT-ND, Temperature Coefficient=±100ppm/°C, Tolerance=±1%, Category=Resistors, ComponentLink1Description="Internal Datasheet", ComponentLink1URL="datasheets\Panasonic Electronic Components\AOA0000CE2.pdf", ComponentLink2Description="External Datasheet", ComponentLink2URL=http://industrial.panasonic.com/www-data/pdf/AOA0000/AOA0000CE2.pdf, Composition="Thick Film", Features=-, Height=0.55MM, Manufacturer Part Number=ERJ-3EKF2492V, Number of Terminations=2, Packaging="Cut Tape (CT)", Resistance (Ohms)=24.9k, Size / Dimension="0.063\" L x 0.031\" W (1.60mm x 0.80mm)", Substitution Notes="24.9k , ±1% , 0603 , AEC-Q200", Supplier 1=Digi-Key
R5 R32 R33 R34 R35 R59 R60 R61 R62: library part ERJ-3GEY0R00V, "RES 0.0 OHM 1/10W JUMP 0603 SMD", Limiting Element Voltage=75, Manufacturer="Panasonic Electronic Components", Maximum Overload Voltage=150, Maximum Working Voltage=0.0V, Package="0603 (1608 Metric)", Package Power="0603  (0.1W)", Power (Watts)="0.1W- 1/10W", Ratings=AEC-Q200, Sort Value Package=603_0, Supplier Package=0603, Supplier Part Number 1=P0.0GCT-ND, Temperature Coefficient=-, Tolerance=Jumper, Category=Resistors, ComponentLink1Description="Internal Datasheet", ComponentLink1URL="datasheets\Panasonic Electronic Components\AOA0000CE1.pdf", ComponentLink2Description="External Datasheet", ComponentLink2URL=http://industrial.panasonic.com/www-data/pdf/AOA0000/AOA0000CE1.pdf, Composition="Thick Film", Features=-, Height=0.55MM, Manufacturer Part Number=ERJ-3GEY0R00V, Number of Terminations=2, Resistance (Ohms)=0, Size / Dimension="0.063\" L x 0.031\" W (1.60mm x 0.80mm)", Sort Value=0, Substitution Notes="0 , Jumper , 0603 , AEC-Q200", Supplier 1=Digi-Key
R6 R8 R9 R13 R14 R20 R30 R36 R44 R63 R64 R65 R66 R67 R73 R74 R82 R116: library part ERJ-3EKF1001V, "RES 1K OHM 1/10W 1% 0603 SMD", Limiting Element Voltage=75, Manufacturer="Panasonic Electronic Components", Maximum Overload Voltage=150, Maximum Working Voltage=10.0V, Package="0603 (1608 Metric)", Package Power="0603  (0.1W)", Power (Watts)="0.1W- 1/10W", Ratings=AEC-Q200, Sort Value=1000, Sort Value Package=603_1000, Supplier Package=0603, Supplier Part Number 1=P1.00KHCT-ND, Temperature Coefficient=±100ppm/°C, Tolerance=±1%, Category=Resistors, ComponentLink1Description="Internal Datasheet", ComponentLink1URL="datasheets\Panasonic Electronic Components\AOA0000CE2.pdf", ComponentLink2Description="External Datasheet", ComponentLink2URL=http://industrial.panasonic.com/www-data/pdf/AOA0000/AOA0000CE2.pdf, Composition="Thick Film", Features=-, Height=0.55MM, Manufacturer Part Number=ERJ-3EKF1001V, Number of Terminations=2, Packaging="Cut Tape (CT)", Resistance (Ohms)=1k, Size / Dimension="0.063\" L x 0.031\" W (1.60mm x 0.80mm)", Substitution Notes="1k , ±1% , 0603 , AEC-Q200", Supplier 1=Digi-Key
R7: library part UR73V2BTTD50L0F, "RES 0.05 OHM 1% 1/2W 1206", Manufacturer="KOA Speer Electronics, Inc.", Operating Temperature="-55°C ~ 155°C", Package=1206, Package Power="PACKAGE (POWER)", Power (Watts)="0.5W, 1/2W", Ratings=AEC-Q200, Supplier Part Number 1=2019-UR73V2BTTD50L0FTR-ND, Temperature Coefficient=±75ppm/°C, Tolerance=±1%, Category=Resistors, ComponentLink1Description="Datasheet (Internal)", ComponentLink1URL=http://www.koaspeer.com/catimages/Products/UR73V/UR73V.pdf, ComponentLink2Description="Datasheet (External)", ComponentLink2URL=http://www.koaspeer.com/catimages/Products/UR73V/UR73V.pdf, Manufacturer 1="KOA Speer Electronics, Inc.", Manufacturer Part Number=UR73V2BTTD50L0F, Manufacturer Part Number 1=UR73V2BTTD50L0F, Substitution Notes="50mΩ , 1206 , ±1% , ±75ppm/°C ,  0.5W, 1/2W , AEC-Q200", Supplier 1=Digikey, Thickness (Max)=0.60MM